# Altium PCB stepstickTester.PcbDoc
Units mm, origin at the board's own origin, x right, y up, seen from the top; angles counter-clockwise.
Board outline 158 x 89 mm, 2 copper layers (Top Layer, Bottom Layer); 77 components, 60 nets, 313 pads, 50 vias.
Unrouted connection lines stored in the file: 83.
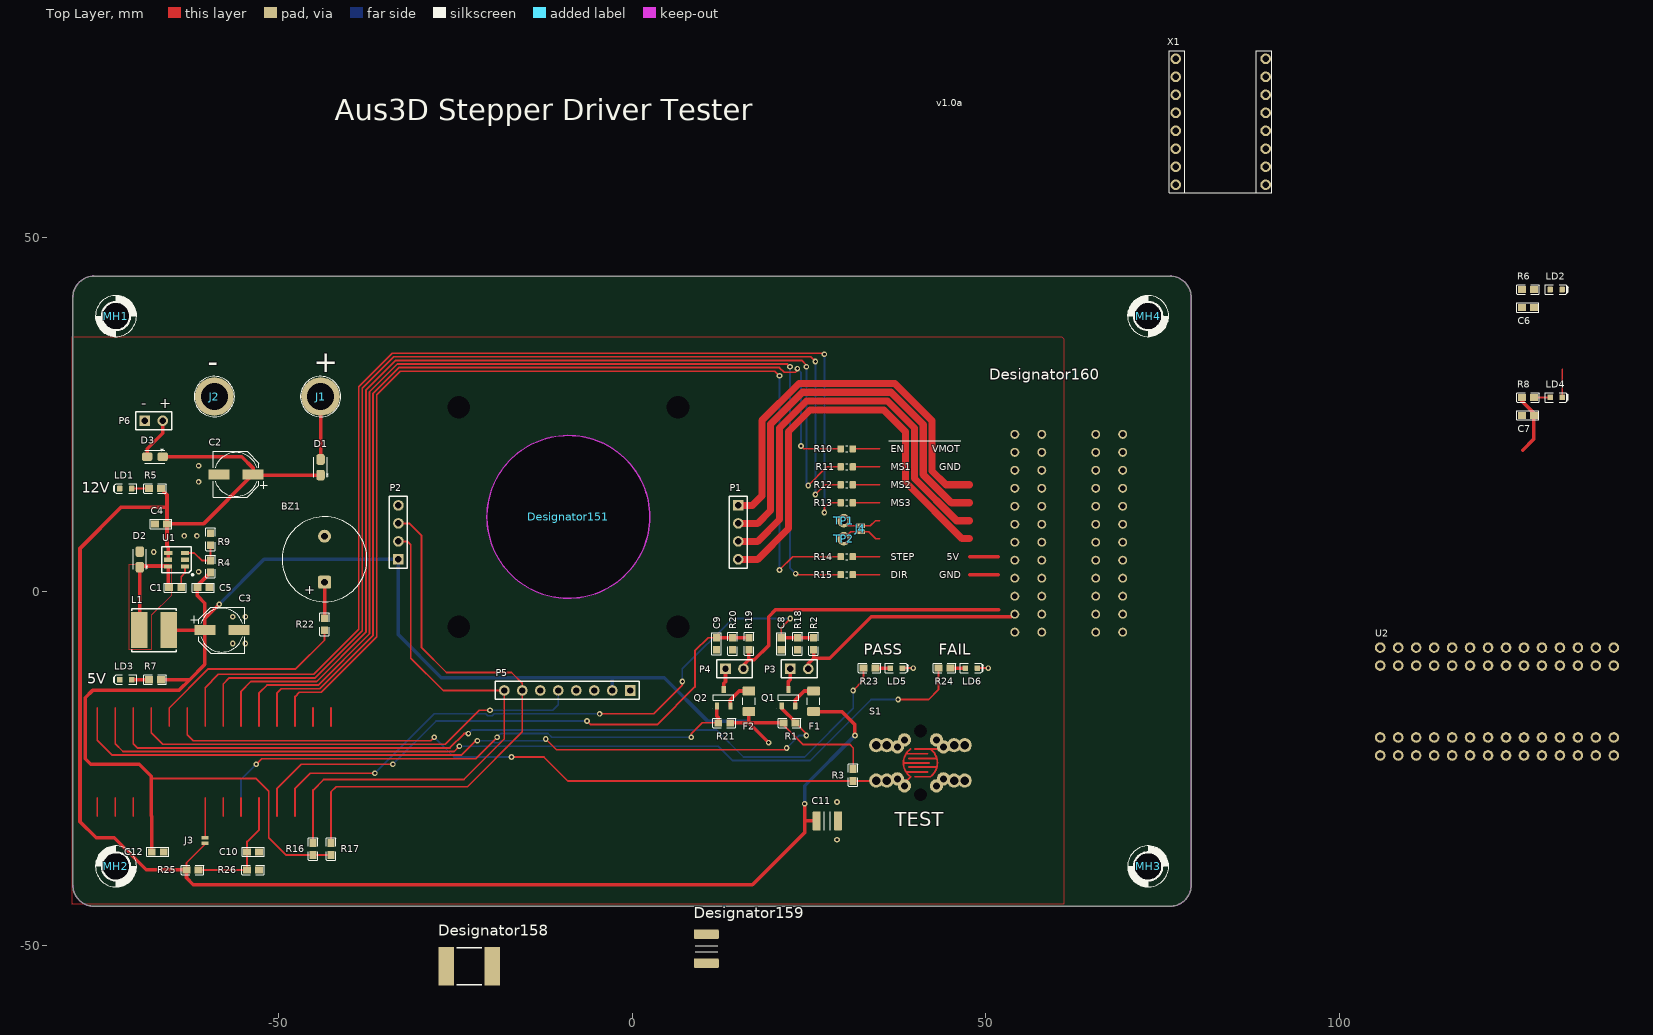
[diagram p0: Top Layer view]
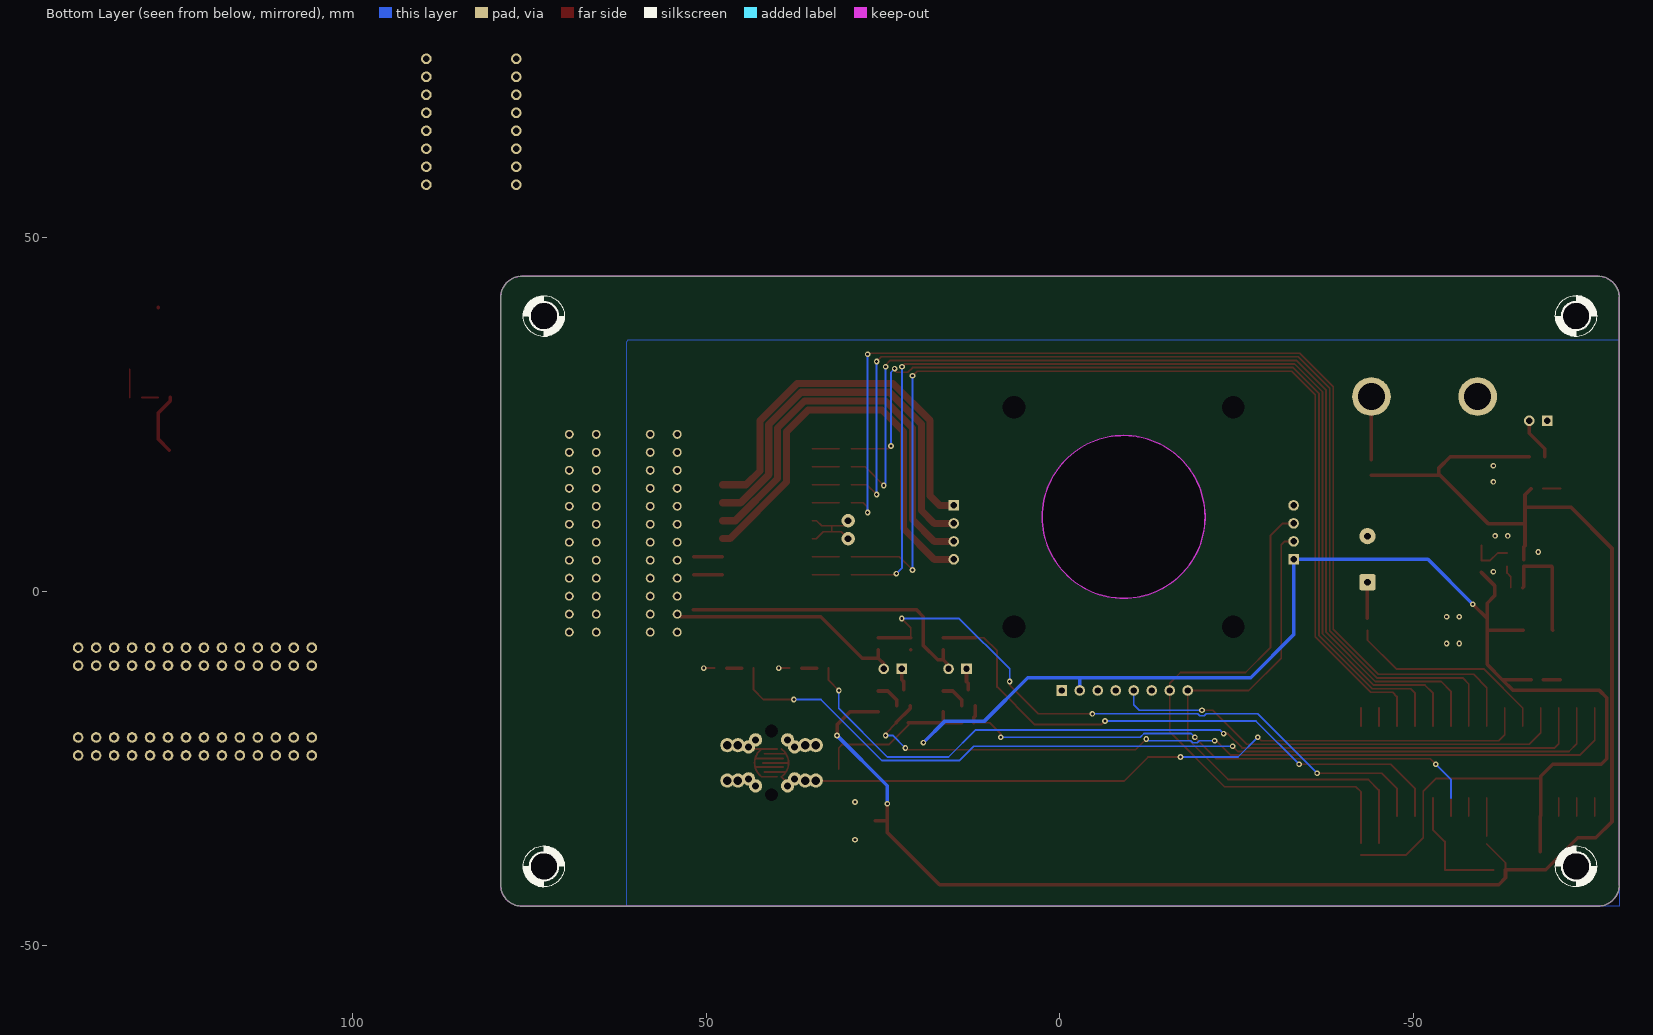
[diagram p1: Bottom Layer view, seen from below]

## Layer stack, top to bottom
Top Solder: solder mask 0.0102, Solder Resist, Dk 3.5
Top Layer: signal copper 0.0356
Dielectric 1: dielectric 0.32, FR-4, Dk 4.8
Bottom Layer: signal copper 0.0356
Bottom Solder: solder mask 0.0102, Solder Resist, Dk 3.5

## Board outline
-76,-44.5 cw(c-76,-41.5) -79,-41.5 -79,41.5 cw(c-76,41.5) -76,44.5 76,44.5 cw(c76,41.5) 79,41.5 79,-41.5 cw(c76,-41.5) 76,-44.5

## Design rules (kind name [scope] priority, off if disabled: settings)
Clearance [All] p1: gap=0.254 ignorepadtopadclearanceinfootprint=FALSE except(0: Arc-Hole Track-Hole SMDPad-Hole THPad-Hole Via-Hole Fill-Hole Poly-Hole Region-Hole Text-Hole)
HoleSize [All] p1: absolutevalues=TRUE maxlimit=3.5 minlimit=0.025 maxpercent=80.000 minpercent=20.000
PolygonConnect PolygonConnect_1 [IsVia] p1: connectstyle=Direct reliefconductorwidth=0.254 reliefentries=4 polygonreliefangle="90 Angle" airgapwidth=0.254
PolygonConnect [All] p2: connectstyle=Relief reliefconductorwidth=0.254 reliefentries=4 polygonreliefangle="90 Angle" airgapwidth=0.254
RoutingVias [All] p1: holewidth=0.4 width=0.8 viastyle="Through Hole" minholewidth=0.35 minwidth=0.7 maxholewidth=0.6 maxwidth=1.2
SolderMaskExpansion [All] p1: expansion=0.102
Width [All] p1: maxlimit=1 minlimit=0.254 preferedwidth=0.254
29 further rules are at their usual default settings.

## Classes and differential pairs
component class stepsticktester: BZ1 C1 C2 C3 C4 C5 C6 C7 C8 C9 C10 C11 C12 D1 D2 D3 F1 F2 J1 J2 J3 J4 L1 LD1 LD2 LD3 LD4 LD5 LD6 MH1 MH2 MH3 MH4 P1 P2 P3 P4 P5 P6 Q1 Q2 R1 R2 R3 R4 R5 R6 R7 R8 R9 R10 R11 R12 R13 R14 R15 R16 R17 R18 R19 R20 R21 R22 R23 R24 R25 R26 S1 TP1 TP2 U1 U2 X1

## Components (designator, comment, footprint, x,y, rotation, side; value= is the part's Value field where it differs from the comment)
BZ1 "Alternate part: 3100-932" BUZZER_12.0X8.5MM -43.44,4.522 r90 top
C1 "CapC-0603-100nF" "Cap 1608-0603" -64.54,0.5 r0 top value=100nF
C2 "CapE-6.3-100uF-35V" "CAP EL PANASONIC" -58.391,16.5 r270 top value="100uF 35V"
C3 "CapE-6.3-100uF-35V" "CAP EL PANASONIC" -55.49,-5.5 r90 top value="100uF 35V"
C4 "CapC-0603-1uF 50V" "Cap 1608-0603" -66.54,9.5 r0 top value=1uF
C5 "CapC-0603-4.7uF" "Cap 1608-0603" -60.54,0.5 r180 top value=4.7uF
C6 "CapC-0603-1uF 50V" "Cap 1608-0603" 126.55,40.08 r0 top value=1uF
C7 "CapC-0603-1uF 50V" "Cap 1608-0603" 126.55,24.84 r0 top value=1uF
C8 "CapC-0603-100nF" "Cap 1608-0603" 21.076,-7.416 r270 top value=100nF
C9 "CapC-0603-100nF" "Cap 1608-0603" 11.932,-7.416 r270 top value=100nF
C10 "CapC-0603-100nF" "Cap 1608-0603" -53.53,-36.82 r0 top value=100nF
C11 "CapC-1210-4.7uF-50V" "CAP 3225-1210" 27.581,-32.435 r180 top value=4.7uF
C12 "CapC-0603-4.7uF" "Cap 1608-0603" -66.992,-36.82 r180 top value=4.7uF
D1 "Diode Schottky 2A 40V" DIOM2616X08N -44,17.51 r90 top
D2 "Diode Schottky 2A 40V" DIOM2616X08N -69.54,4.5 r90 top
D3 "Diode Schottky 2A 40V" DIOM2616X08N -67.4,19 r180 top
Designator151 "Comment" "NEMA-17 CUTOUT" -9,10.5 r180 top
Designator158 "Comment" Chip2PinSM7451X17N -23,-53 r0 top
Designator159 "Comment" CAPC4532X280N 10.5,-50.5 r90 top
Designator160 "Comment" "ZIF Socket - 2 x 12" 61.69,-5.78 r0 top
F1 "PTC Resettable Fuse" "RES 3216-1206" 25.648,-15.544 r90 top value=200mA
F2 "PTC Resettable Fuse" "RES 3216-1206" 16.504,-15.544 r90 top value=200mA
J1 "Through-hole banana jack" BANANA_CONN -44,27.5 r0 top
J2 "Through-hole banana jack" BANANA_CONN -59,27.5 r0 top
J3 "Jumper" JUMPER-2-NO -60.3,-35.2 r270 top
J4 "Jumper" JUMPER-2-NC_BY_PASTE 32.252,8.84 r270 top
L1 "Inductor SMD 33uH 2.5A" "SRN6045TA SMD Inductor" -67.54,-5.5 r90 top value=33uH
LD1 "GREEN" "LED 1608-0603" -71.54,14.5 r180 top
LD2 "GREEN" "LED 1608-0603" 130.55,42.62 r0 top
LD3 "GREEN" "LED 1608-0603" -71.54,-12.5 r180 top
LD4 "GREEN" "LED 1608-0603" 130.55,27.38 r0 top
LD5 "GREEN" "LED 1608-0603" 37.349,-10.859 r0 top
LD6 "RED" "LED 1608-0603" 47.939,-10.859 r0 top
MH1 "Screw Hole" M3-Hole-2 -72.9,38.875 r0 top
MH2 "Screw Hole" M3-Hole-2 -72.9,-38.875 r90 top
MH3 "Screw Hole" M3-Hole-2 72.9,-38.875 r0 top
MH4 "Screw Hole" M3-Hole-2 72.9,38.875 r90 top
P1 "Stepper Motor" HDR1X4-HEADER 15,12.12 r270 top
P2 "Encoder" HDR1X4-HEADER -33,4.5 r90 top
P3 "Current Shunt" HDR1X2-HEADER 22.346,-10.972 r0 top
P4 "Current Shunt" HDR1X2-HEADER 13.202,-10.972 r0 top
P5 "Display" HDR1X8-HEADER -0.26,-14.02 r180 top
P6 "Alt Power In" HDR1X2-HEADER -68.84,24.08 r0 top
Q1 "DMP3099L-7" "SOT23-3 New" 22.092,-15.036 r90 top
Q2 "DMP3099L-7" "SOT23-3 New" 12.948,-15.036 r90 top
R1 "Res-0603-10K" "RES 1608-0603" 22.258,-18.592 r180 top value=10K
R2 "Res-0603-4K7" "RES 1608-0603" 25.648,-7.416 r270 top value=4.7K
R3 "Res-0603-10K" "RES 1608-0603" 31.236,-25.958 r90 top value=10K
R4 "Res-0603-54K9" "RES 1608-0603" -59.54,3.5 r270 top value=54.9k
R5 "Res-0603-1K" "RES 1608-0603" -67.39,14.5 r0 top value=1K
R6 "Res-0603-1K" "RES 1608-0603" 126.55,42.62 r180 top value=1K
R7 "Res-0603-1K" "RES 1608-0603" -67.39,-12.5 r0 top value=1K
R8 "Res-0603-1K" "RES 1608-0603" 126.55,27.38 r180 top value=1K
R9 "Res-0603-10K" "RES 1608-0603" -59.54,7.35 r270 top value=10K
R10 "Thick Film" RESC1608X55N 30.34,20.12 r0 top value=470R
R11 "Thick Film" RESC1608X55N 30.34,17.58 r0 top value=470R
R12 "Thick Film" RESC1608X55N 30.34,15.04 r0 top value=470R
R13 "Thick Film" RESC1608X55N 30.34,12.5 r0 top value=470R
R14 "Thick Film" RESC1608X55N 30.34,4.88 r0 top value=470R
R15 "Thick Film" RESC1608X55N 30.34,2.34 r0 top value=470R
R16 "Res-0603-4K7" "RES 1608-0603" -45.06,-36.4 r270 top value=4.7K
R17 "Res-0603-4K7" "RES 1608-0603" -42.52,-36.4 r270 top value=4.7K
R18 "Res-0603-1K" "RES 1608-0603" 23.362,-7.416 r90 top value=1K
R19 "Res-0603-4K7" "RES 1608-0603" 16.504,-7.416 r270 top value=4.7K
R20 "Res-0603-1K" "RES 1608-0603" 14.218,-7.416 r90 top value=1K
R21 "Res-0603-10K" "RES 1608-0603" 13.036,-18.592 r0 top value=10K
R22 "Res-0603-100R" "RES 1608-0603" -43.44,-4.658 r90 top value=100R
R23 "Res-0603-1K" "RES 1608-0603" 33.539,-10.859 r180 top value=1K
R24 "Res-0603-1K" "RES 1608-0603" 44.129,-10.859 r180 top value=1K
R25 "Res-0603-4K7" "RES 1608-0603" -62.088,-39.36 r180 top value=4.7K
R26 "Res-0603-1K" "RES 1608-0603" -53.53,-39.36 r180 top value=1K
S1 "Tactile Button - Omron B3F-5050" "Tactile Button - B3F-5050" 40.739,-24.249 r0 top
TP1 "TESTPOINT" THP_D38_T75_B75 29.92,9.96 r0 top
TP2 "TESTPOINT" THP_D38_T75_B75 29.92,7.42 r90 top
U1 "AOZ1282CI" SOT23-6N -64.34,4.45 r180 top
U2 "Adafruit Metro Mini" "Adafruit Metro Mini - Double Rows" 105.68,-7.96 r0 top
X1 "A4988BREAKOUT" A4988BREAKOUT 76.8,75.2 r270 top

## Footprints (in the part's own frame and the unit in brackets; to place one, negate y for a bottom-side part, rotate by r counter-clockwise, add the part's x,y. Pads: shape width x height; smd on the part's side, far side on the other; paste and mask are expansions set on the pad)
A4988BREAKOUT [mm]
  round 1.51 hole 0.9: 1(0,0) 2(2.54,0) 3(5.08,0) 4(7.62,0) 5(10.16,0) 6(12.7,0) 7(15.24,0) 8(17.78,0) 9(17.78,12.7) 10(15.24,12.7) 11(12.7,12.7) 12(10.16,12.7) 13(7.62,12.7) 14(5.08,12.7) 15(2.54,12.7) 16(0,12.7)
  silkscreen extent -1.14,-0.89 18.92,13.59, body extent -1.27,-1.33 19.05,13.91, height 8.5
"Adafruit Metro Mini - Double Rows" [mm]
  round 1.5 hole 0.9: 0(33.02,-2.54) 0(33.02,0) 1(30.48,-2.54) 1(30.48,0) 2(27.94,-2.54) 2(27.94,0) 3(25.4,-2.54) 3(25.4,0) 4(22.86,-2.54) 4(22.86,0) 5(20.32,-2.54) 5(20.32,0) 6(17.78,-2.54) 6(17.78,0) 7(15.24,-2.54) 7(15.24,0) 8(12.7,-2.54) 8(12.7,0) 9(10.16,-2.54) 9(10.16,0) 10(7.62,-2.54) 10(7.62,0) 11(5.08,-2.54) 11(5.08,0) 12(2.54,-2.54) 12(2.54,0) 13(0,-2.54) 13(0,0) 14(0,-15.24) 14(0,-12.7) 15(2.54,-15.24) 15(2.54,-12.7) 16(5.08,-15.24) 16(5.08,-12.7) 17(7.62,-15.24) 17(7.62,-12.7) 18(10.16,-15.24) 18(10.16,-12.7) 19(12.7,-15.24) 19(12.7,-12.7) 20(15.24,-15.24) 20(15.24,-12.7) 21(17.78,-15.24) 21(17.78,-12.7) 22(20.32,-15.24) 22(20.32,-12.7) 23(22.86,-15.24) 23(22.86,-12.7) 24(25.4,-15.24) 24(25.4,-12.7) 25(27.94,-15.24) 25(27.94,-12.7) 26(30.48,-15.24) 26(30.48,-12.7) 27(33.02,-15.24) 27(33.02,-12.7)
BANANA_CONN [mil]
  round 215 hole 150: P$1(0,0)
  silkscreen extent -112,-112 112,112
BUZZER_12.0X8.5MM [mil]
  round 20 on Mech15: 0(0,0)
  rrect25% 72x72 / inner rrect25% 72x72 / far side rrect25% 90x90 hole 38: 1(-127.95,0)
  round 72 / inner round 72 / far side round 90 hole 38: 2(127.95,0)
  silkscreen extent -236,-236 236,236, body extent -246,-246 246,246, height 354
"Cap 1608-0603" [mm]
  rect 1.1x1 smd: 1(-0.85,0) 2(0.85,0)
  silkscreen extent -1.55,-0.65 1.55,0.65, body extent -0.8,-0.4 0.8,0.4, height 0.4
"CAP 3225-1210" [mm] "Chip Capacitor, Body 3.2x2.5mm, EIA 1210, IPC Medium Density"
  round 0.508 on Mech15: 0(0,0)
  rrect25% 1.15x2.7 smd: 1(-1.5,0) 2(1.5,0)
  silkscreen extent -0.4,-1.3 0.4,1.3, body extent -1.8,-1.4 1.8,1.4, height 2.19
"CAP EL PANASONIC" [mil]
  rect 55x118 smd: 1(0,190.97) 2(0,1.97)
  silkscreen extent -128,-31 127,271, body extent -134,-57 134,250, height 217
CAPC4532X280N [mm] "Chip Capacitor, Body 4.5x3.2mm, 1812, IPC Medium Density"
  round 0.508 on Mech15: 0(0,0)
  rrect25% 1.4x3.5 smd: 1(-2.05,0) 2(2.05,0)
  silkscreen extent -0.4,-1.6 0.4,1.6, body extent -2.45,-1.8 2.45,1.8, height 2.79
Chip2PinSM7451X17N [mm] ", 2-Leads, Body 7.36x5.12mm, IPC Medium Density"
  rect 2.2x5.45 smd: 1(-3.25,0) 2(3.25,0)
  silkscreen extent -1.75,-2.62 1.75,2.63, body extent 0,0 0,0
DIOM2616X08N [mm] "Molded Diode, 2-Leads, Body 2.60x1.60mm, IPC Medium Density"
  rrect50% 1.5x1.2 smd: A(1.1,0) K(-1.1,0)
  silkscreen extent -1.4,-1.11 1.4,0.95, body extent -1.35,-0.85 1.35,0.85, height 0.85
HDR1X2-HEADER [mm]
  rect 1.5x1.5 hole 0.9: 1(0,0)
  round 1.5 hole 0.9: 2(2.54,0)
  silkscreen extent -1.27,-1.27 3.81,1.27, body extent -1.27,-1.27 3.81,1.27, height 8.6
HDR1X4-HEADER [mm]
  rect 1.5x1.5 hole 0.9: 1(0,0)
  round 1.5 hole 0.9: 2(2.54,0) 3(5.08,0) 4(7.62,0)
  silkscreen extent -1.27,-1.27 8.89,1.27, body extent -1.27,-1.27 8.89,1.27, height 8.6
HDR1X8-HEADER [mm]
  rect 1.5x1.5 hole 0.9: 1(0,0)
  round 1.5 hole 0.9: 2(2.54,0) 3(5.08,0) 4(7.62,0) 5(10.16,0) 6(12.7,0) 7(15.24,0) 8(17.78,0)
  silkscreen extent -1.27,-1.27 19.05,1.27, body extent -1.27,-1.27 19.05,1.27, height 8.6
JUMPER-2-NC_BY_PASTE [mil]
  rect 25x50 smd: 1(-15.78,0) 2(17,0)
JUMPER-2-NO [mm]
  rect 0.5x1 smd: 1(-0.4,0) 2(0.4,0)
"LED 1608-0603" [mm]
  round 0.254 on Mech15: 0(0,0)
  rrect25% 0.8x0.8 smd: 1(-0.85,0) 2(0.85,0)
  Top Layer pour cut-out: -0.5,0.5 0.5,0.5 0.5,-0.5 -0.5,-0.5
  silkscreen extent -1.55,-0.67 1.68,0.67, body extent -0.8,-0.4 0.8,0.4, height 0.75
M3-Hole-2 [mm]
  round 3.6 hole 4.2: M3(0,0)
  silkscreen extent -2.9,-2.93 2.9,2.93
"NEMA-17 CUTOUT" [mm]
  round 0 hole 3.2: ""(-15.5,15.5) ""(-15.5,-15.5) ""(15.5,15.5) ""(15.5,-15.5)
  Keep-Out Layer circle w0.1: c0,0 r11.5
  Keep-Out Layer board cut-out: 0,-11.5 -4.401,-10.625 -8.132,-8.132 -10.625,-4.401 -11.5,0 -11.5,0 -10.625,4.401 -8.132,8.132 -4.401,10.625 0,11.5 0,11.5 4.401,10.625 8.132,8.132 10.625,4.401 11.5,0 11.5,0 10.625,-4.401 8.132,-8.132 4.401,-10.625 0,-11.5
"RES 1608-0603" [mm]
  rect 1.1x1 smd: 1(-0.85,0) 2(0.85,0)
  silkscreen extent -1.6,-0.67 1.6,0.67, body extent -0.77,-0.38 0.82,0.43, height 0.4
"RES 3216-1206" [mm] "Chip Resistor, Body 3.2x1.6mm, EIA 1206, IPC Medium Density"
  round 0.508 on Mech15: 0(0,0)
  rrect25% 1.3x1.8 smd: 1(-1.45,0) 2(1.45,0)
  silkscreen extent -0.51,-0.89 0.51,0.89, body extent -1.62,-0.82 1.63,0.83, height 0.69
RESC1608X55N [mm] "Chip Resistor, Body 1.6x0.8mm, EIA 0603, IPC Medium Density"
  round 0.254 on Mech15: 0(0,0)
  rrect25% 0.9x1 smd: 1(-0.85,0) 2(0.85,0)
  Top Layer pour cut-out: -0.6,0.5 -0.4,0.7 0.4,0.7 0.6,0.5 0.6,-0.5 0.4,-0.7 -0.4,-0.7 -0.6,-0.5
  silkscreen extent -0.15,-0.41 0.15,0.41, body extent -0.87,-0.47 0.88,0.48, height 0.54
"SOT23-3 New" [mm] "SOT23, 3 pin"
  round 0.5 on Mech15: 0(0,0)
  rrect25% 1x0.6 smd: 1(-1.15,0.95) 2(-1.15,-0.95) 3(1.15,0)
  silkscreen extent -0.38,-1.45 0.38,1.45, body extent -1.4,-1.45 1.4,1.45, height 1.29
SOT23-6N [mm]
  rect 1.15x0.6 smd: 1(-1.175,0.95) 2(-1.175,0) 3(-1.175,-0.95) 4(1.175,-0.95) 5(1.2,0) 6(1.2,0.95)
  silkscreen extent -2.38,-1.82 2.1,2.25, body extent -0.85,-1.5 0.85,1.5, height 1.45
"SRN6045TA SMD Inductor" [mm]
  rect 5.1x2.35 smd: 1(0,2.075) 2(0,-2.075)
  silkscreen extent -3.05,-3.15 3.05,3.15, body extent -3,-3 3,3, height 4.25
"Tactile Button - B3F-5050" [mm]
  round 2 hole 1.2: 0(-6.25,2.5) 0(-4.75,2.5) 0(4.75,-2.5) 0(6.25,-2.5) 1(4.75,2.5) 1(6.25,2.5) 2(-6.25,-2.5) 2(-4.75,-2.5)
  round 1.88 hole 1.016: 0(-3.251,2.261) 0(-2.261,3.251) 0(2.261,-3.251) 0(3.251,-2.261) 1(2.261,3.251) 1(3.251,2.261) 2(-3.251,-2.261) 2(-2.261,-3.251)
  round 1.6 hole 1.8: 5(0,4.5) 6(0,-4.5)
  Top Layer lines w0.254: -6.25,-2.5 -4.75,-2.5 -3.251,-2.5 -2.261,-2.5 -1.91,-2.5 -1.376,-1.966 cw(c0,0) -2.4,0 ; -2,-1.3 1,-1.3 ; -2,1.3 1,1.3 ; -1.6,-0.6 2.2,-0.6 ; -1.6,0.6 2.2,0.6 ; -1.376,1.966 ccw(c0,0) -2.4,0 ; -0.766,-1.966 1.376,-1.966 ccw(c0,0) 1.376,1.966 ; -0.766,1.966 1.376,1.966 ; 1.25,0 -2.4,0 ; 5.716,1.966 4.75,1.966 3.251,1.966 1.376,1.966
  body extent -6,-6 6,6, height 7.3
THP_D38_T75_B75 [mil] "Thru-Hole Pad with 75mil top and 75mil bottom annular rings"
  round 75 hole 38: 1(0,0)
"ZIF Socket - 2 x 12" [mil]
  round 50 hole 32: 1(-300,0) 1(-150,0) 2(-300,100) 2(-150,100) 3(-300,200) 3(-150,200) 4(-300,300) 4(-150,300) 5(-300,400) 5(-150,400) 6(-300,500) 6(-150,500) 7(-300,600) 7(-150,600) 8(-300,700) 8(-150,700) 9(-300,800) 9(-150,800) 10(-300,900) 10(-150,900) 11(-300,1000) 11(-150,1000) 12(-300,1100) 12(-150,1100) 13(150,0) 13(300,0) 14(150,100) 14(300,100) 15(150,200) 15(300,200) 16(150,300) 16(300,300) 17(150,400) 17(300,400) 18(150,500) 18(300,500) 19(150,600) 19(300,600) 20(150,700) 20(300,700) 21(150,800) 21(300,800) 22(150,900) 22(300,900) 23(150,1000) 23(300,1000) 24(150,1100) 24(300,1100)

## Part data
BZ1: library part BZ_12x8.5x6.5_2kHz, "Speaker, Magnetic Transducer", Manufacturer 1="CUI Inc", Manufacturer Part Number 1=CEM-1201(50), Package / Case="6.5mm pitch", Ratings="2048 ±200 Hz", Supplier Part Number 1=102-1152-ND, Material="Noryl SE1-J", SCDType=source, Supplier 1=Digi-Key
C1 C8 C9 C10: "Capacitor (Semiconductor SIM Model)", Supplier Part Number 1=311-1344-1-ND, Note="Approved sub OK", Published=8-Jun-2000, Publisher="Altium Limited", Revision="July-2002: Re-released for DXP Platform.", Supplier 1=Digi-Key
C2 C3: "Polarized Capacitor (Surface Mount)", Supplier Part Number 1=PCE5016CT-ND, Note="Approved sub OK", Published=8-Jun-2000, Publisher="Altium Limited", Revision="July-2002: Re-released for DXP Platform.", Supplier 1=Digi-Key
C4 C6 C7: "Capacitor (Semiconductor SIM Model)", Supplier Part Number 1=1276-1860-1-ND, Voltage=50V, Note="Approved sub OK", Published=8-Jun-2000, Publisher="Altium Limited", Revision="July-2002: Re-released for DXP Platform.", Supplier 1=Digi-Key
C5 C12: "Capacitor (Semiconductor SIM Model)", Supplier Part Number 1=311-1521-1-ND, Note="Approved sub OK", Published=8-Jun-2000, Publisher="Altium Limited", Revision="July-2002: Re-released for DXP Platform.", Supplier 1=Digi-Key
C11: "Capacitor (Semiconductor SIM Model)", Supplier Part Number 1=490-1864-1-ND, Voltage=50V, Note="Approved sub OK", Published=8-Jun-2000, Publisher="Altium Limited", Revision="July-2002: Re-released for DXP Platform.", Supplier 1=Digi-Key
D1 D2 D3: "Default Diode", Supplier Part Number 1=DB2W40200LCT-ND, Code - JEDEC=DO-214-AB, Note="Approved sub OK", Published=8-Jun-2000, Publisher="Altium Limited", Revision="July-2002: Re-released for DXP Platform.", Supplier 1=Digi-Key
F1 F2: library part "Fuse - 30V 200mA Trip PTC SMD 1206", "Fuse - 30V 200mA Trip PTC SMD 1206", Package / Case="1206 (3216 metric)", Supplier Part Number 1=507-1797-1-ND, Supplier 1=Digi-Key
J1 J2: library part BANANA_CONN
J3: library part JUMP1-NO, "SMD jumper"
J4: library part JUMP1-NC, "SMD jumper"
L1: "MagneticCore Inductor with Winding Polarity Marking", Supplier Part Number 1=SRN6045TA-330MCT-ND, Note="Approved sub OK", Published=24-Mar-1999, Publisher="Altium Limited", Revision="July-2002: Re-released for DXP Platform.", Supplier 1=Digi-Key
LD1 LD2 LD3 LD4 LD5: library part "LEDG  0603", "Hyper-Bright LED", Supplier Part Number 1=160-1435-2-ND, Note="Approved sub OK", Supplier 1=Digi-Key
LD6: library part "LEDR  0603", "Hyper-Bright LED", Supplier Part Number 1=160-1435-2-ND, Note="Approved sub OK", Supplier 1=Digi-Key
P1 P2: library part "Header 4", "Header, 4-Pin", Supplier Part Number 1=3M9449-ND, LatestRevisionDate=17-Jul-2002, LatestRevisionNote="Re-released for DXP Platform.", Note="Approved sub OK", Publisher="Altium Limited", Supplier 1=Digi-Key
P3 P4 P6: library part "Header 2", "Header, 2-Pin", Supplier Part Number 1=3M9447-ND, LatestRevisionDate=17-Jul-2002, LatestRevisionNote="Re-released for DXP Platform.", Note="Approved sub OK", Publisher="Altium Limited", Supplier 1=Digi-Key
P5: library part "Header 8x1", "Header, 8-Pin", Supplier Part Number 1=3M9449-ND, LatestRevisionDate=17-Jul-2002, LatestRevisionNote="Re-released for DXP Platform.", Note="Approved sub OK", Publisher="Altium Limited", Supplier 1=Digi-Key
Q1 Q2: library part "MOSFET SMD P-CH 20V 3.8A TSOT-23-6", "MOSFET SMD P-CH 20V 3.8A SOT-23-3", Supplier Part Number 1=DMP3099L-7DICT-ND, FET Type="MOSFET P-Channel, Metal Oxide", Supplier 1=Digi-Key
R1 R3 R9 R21: "Resistor", Supplier Part Number 1=311-10.0KHRCT-ND, Note="Approved sub OK", Published=8-Jun-2000, Publisher="Altium Limited", Revision="July-2002: Re-released for DXP Platform.", Supplier 1=Digi-Key
R2 R16 R17 R19 R25: "Resistor", Supplier Part Number 1=311-4.7KGRCT-ND, Note="Approved sub OK", Published=8-Jun-2000, Publisher="Altium Limited", Revision="July-2002: Re-released for DXP Platform.", Supplier 1=Digi-Key
R4: library part Res-0603-10K, "Resistor", Supplier Part Number 1=311-10.0KHRCT-ND, Note="Approved sub OK", Published=8-Jun-2000, Publisher="Altium Limited", Revision="July-2002: Re-released for DXP Platform.", Supplier 1=Digi-Key
R5 R6 R7 R8 R18 R20 R23 R24 R26: "Resistor", Supplier Part Number 1=311-1.00KHRCT-ND, Note="Approved sub OK", Published=8-Jun-2000, Publisher="Altium Limited", Revision="July-2002: Re-released for DXP Platform.", Supplier 1=Digi-Key
R10 R11 R12 R13 R14 R15: library part RES_470R_0603_5%, "Resistor SMD chip 470 Ohm 0.1W 5% 0603", Manufacturer 1=Vishay/Dale, Manufacturer Part Number 1=CRCW0603470RJNEA, Package / Case="0603 (1608 metric)", Ratings="1/10 W", Supplier Part Number 1=541-470GCT-ND, TOLERANCE=±5%, Material="Thick Film", SCDType=spec, Supplier 1=Digi-Key
R22: "Resistor", Supplier Part Number 1=311-100HRCT-ND, Note="Approved sub OK", Published=8-Jun-2000, Publisher="Altium Limited", Revision="July-2002: Re-released for DXP Platform.", Supplier 1=Digi-Key
S1: Manufacturer 1=E-Switch, Manufacturer Part Number 1=TL-1105-C-F160-Q, Package / Case="6.0x6.0mm; 8.0mm stem", Supplier Part Number 1=SW801-ND, Function=On/Off, Material="Brass/Nylon/Ag plating", SCDType=source*, Supplier 1=Digi-Key
TP1 TP2: "SMD test pin"
U1: library part "Buck Regulator AOZ1282CI", Supplier Part Number 1=785-1613-1-ND, Supplier 1=Digi-Key
X1: Supplier Part Number 1=S7006-ND, Supplier 1=Digi-Key

## Via types
v1: diameter 0.8, hole 0.4, Top Layer to Bottom Layer, tented both sides, 50 vias

## Nets (pads, with @x,y where several pads share a name; then routed paths per layer and width w, separated by ;. In a path a pad name is that pad's centre, name@x,y a point inside that pad or via, vN(x,y) a via of type N, cw(c..) or ccw(c..) an arc to the next point about the centre after c; other vN are vias at no path point)
+3V: U2.16 | length 2.5
  Top Layer w0.254: -70.46,-31.74 -70.46,-29.2
+5V: C3.1 C5.2 C12.2 F2.1 L1.2 P2.1 P5.2 R1.2 R3.2 R4.2 R7.2 R16.2 R17.2 R21.2 U2.17 | length 235
  Top Layer w0.254: -67.92,-26.466 -53.092,-26.466 -51.314,-28.244 -51.314,-34.848 -48.912,-37.25 R16.2 R17.2 ; R1.2 21.408,-18.924 24.124,-21.64 30.728,-21.64 31.236,-22.148 R3.2
  Top Layer w0.5: C12.2 -67.842,-31.818 -67.92,-31.74 -67.92,-26.466 -67.92,-26.116 -69.602,-24.434 -76.46,-24.434 -77.222,-23.672 -77.222,-15.036 -76.206,-14.02 -64.014,-14.02 -62.494,-12.5 ; R7.2 -62.494,-12.5 ; L1.2 C3.1 ; R4.2 -61.39,0.8 C5.2 -61.39,-0.642 -60.341,-1.691 -60.341,-3.86 ; v1(-58.309,-1.828) -60.341,-3.86 ; R21.2 16.504,-18.592 ; F2.1 16.504,-18.592 ; v1(19.298,-21.386) 16.504,-18.592 ; R1.2 16.504,-18.592 ; -62.494,-12.5 -60.341,-10.347 C3.1 ; C3.1 -60.341,-3.86
  Bottom Layer w0.5: v1(-58.309,-1.828) -51.981,4.5 P2.1 -33,-6.172 -26.93,-12.242 -2.8,-12.242 ; P5.2 -2.8,-12.242 ; v1(19.298,-21.386) 16.25,-18.338 10.662,-18.338 4.566,-12.242 -2.8,-12.242
+12V: C2.1 C4.2 C11.2 D1.K D3.K F1.1 J3.2 R5.2 R25.2 U1.4 U1.5 | length 243.8
  Top Layer w0.254: R25.2 -62.938,-38.344 J3.2@-60.3,-35.706
  Top Layer w0.5: R5.2 -65.69,13.65 -65.69,11.888 ; D3.K -55.124,19 -53.54,17.416 C2.1 ; U1.5 -65.54,6.298 -65.538,6.3 -65.69,6.452 C4.2 ; D1.K -53.45,16.41 C2.1 ; v1(24.378,-30.022) 24.378,-32.308 ; F1.1 29.638,-16.994 31.49,-18.846 v1(31.49,-20.37) ; C11.2 24.505,-32.435 24.378,-32.308 ; C4.2 -60.54,9.5 C2.1 ; C4.2 -65.69,11.888 ; -65.69,11.888 -72.142,11.888 -77.984,6.046 -77.984,-32.562 -75.698,-34.848 -73.158,-34.848 -68.646,-39.36 R25.2 -62.938,-40.496 -61.982,-41.452 17.012,-41.452 24.378,-34.086 24.378,-32.308
  Bottom Layer w0.5: v1(24.378,-30.022) 24.378,-27.482 v1(31.49,-20.37)
+STEPPER_5V: C7.2 P4.2 R8.2 R19.2 X1.10 | length 56.5
  Top Layer w0.5: P4.2 15.742,-10.464 16.504,-9.702 ; R19.2 16.504,-9.702 ; 47.7,4.88 51.7,4.88 ; 51.81,-2.59 20.314,-2.59 19.298,-3.606 19.298,-7.67 17.266,-9.702 16.504,-9.702 ; R8.2 125.7,26.878 127.4,25.178 C7.2 127.4,21.5 125.81,19.91
+STEPPER_12V: C6.2 P3.2 R2.2 R6.2 X1.16 | length 33.4
  Top Layer w0.5: P3.2 24.886,-10.21 25.648,-9.448 ; R2.2 25.648,-9.448 ; 53.588,-3.606 33.776,-3.606 27.934,-9.448 25.648,-9.448 ; C6.2 C6.2@127.4,40.143
+USB: U2.14 | length 2.5
  Top Layer w0.254: -75.54,-31.74 -75.54,-29.2
AREF: U2.21 | length 2.5
  Top Layer w0.254: -57.76,-31.74 -57.76,-29.2
BTN_TEST: R3.1 S1.2 U2.8 | length 105.7
  Top Layer w0.254: -62.84,-16.5 -62.84,-20.274 -62.001,-21.113 -28.435,-21.113 v1(-27.946,-20.624) ; v1(-17.024,-23.418) -12.452,-23.418 -9.062,-26.808 R3.1 35.93,-26.808 S1.2@35.989,-26.749
  Bottom Layer w0.254: v1(-27.946,-20.624) -25.152,-23.418 v1(-17.024,-23.418)
BUZZER: R22.1 U2.9 | length 29.9
  Top Layer w0.254: -65.38,-19.04 -65.38,-16.5 -59.852,-10.972 -47.504,-10.972 -43.44,-6.908 R22.1
FB1: R4.1 R9.2 U1.3 | length 6.2
  Top Layer w0.254: U1.3 -61.844,5.4 -60.794,4.35 R4.1 R9.2
GND: BZ1.2 C2.2 C3.2 C4.1 C5.1 C6.1 C7.1 C8.2 C9.2 C10.2 C11.1 C12.1 D2.A J2.P$1 LD1.2 LD2.2 LD3.2 LD4.2 LD5.2 LD6.2 P2.4 P5.1 P6.1 R9.1 R18.1 R20.1 R26.1 S1.1 U1.2 U2.18 U2.19 X1.9 X1.15 | length 11
  Top Layer w0.254: LD5.2 v1(39.731,-10.859) ; LD6.2 v1(50.321,-10.859) ; 131.398,31.34 131.4,31.338 LD4.2
  Top Layer w0.5: 47.7,2.34 51.7,2.34
  other v1: 28.95,-35.102 28.95,-29.768 -56.394,-7.394 -54.616,-7.394 -56.394,-3.606 -54.616,-3.606 -61.22,2.744 -67.57,5.538 -63.252,7.824 -61.474,7.824 -61.22,15.444 -61.22,17.73
GREEN_LED: R23.2 U2.11 | length 118.8
  Top Layer w0.254: -70.46,-16.5 -70.46,-21.544 -69.875,-22.129 -25.729,-22.129 -23.717,-20.116 v1(-23.12,-20.116) ; v1(31.236,-14.02) 32.689,-12.567 R23.2
  Bottom Layer w0.254: v1(-23.12,-20.116) -22.593,-19.589 11.913,-19.589 15.742,-23.418 24.378,-23.418 31.236,-16.56 v1(31.236,-14.02)
I2C_SCL: P2.3 P5.7 R17.1 U2.27 | length 80.7
  Top Layer w0.254: R17.1 -42.52,-28.34 -41.789,-27.609 -23.247,-27.609 -15.5,-19.862 P5.7 -15.5,-13.004 -17.024,-11.48 -26.212,-11.48 -29.724,-7.968 -29.724,7.824 -31.48,9.58 P2.3
I2C_SDA: P2.2 P5.8 R16.1 U2.26 | length 77.4
  Top Layer w0.254: R16.1 -45.06,-28.086 -43.567,-26.593 -23.755,-26.593 -18.04,-20.878 P5.8 -26.676,-14.02 -31.248,-9.448 -31.248,6.554 -31.734,7.04 P2.2
LCD_CS: P5.4
LCD_DC: P5.6
LCD_RST: P5.5 U2.10 | length 66
  Top Layer w0.254: -67.92,-16.5 -67.92,-20.02 -66.319,-21.621 -26.403,-21.621 -21.596,-16.814 v1(-20.072,-16.814)
  Bottom Layer w0.254: v1(-20.072,-16.814) -11.182,-16.814 -10.42,-16.052 P5.5
NetBZ1_1: BZ1.1 R22.2 | length 5.1
  Top Layer w0.5: R22.2 BZ1.1
NetC1_1: C1.1 D2.K L1.1 U1.6 | length 16
  Top Layer w0.5: L1.1 -69.54,-5.425 D2.K -69.44,3.5 U1.6 -65.54,0.65 C1.1
NetC1_2: C1.2 U1.1 | length 3.2
  Top Layer w0.254: C1.2 -63.69,2.052 -63.165,2.577 U1.1
NetD1_A: D1.A J1.P$1 | length 8.9
  Top Layer w0.5: D1.A J1.P$1
NetD3_A: D3.A P6.2 | length 6
  Top Layer w0.5: D3.A -68.5,20.102 -66.3,22.302 P6.2
NetF1_2: F1.2 Q1.2 | length 4
  Top Layer w0.5: Q1.2 23.042,-15.356 24.304,-14.094 F1.2
NetF2_2: F2.2 Q2.2 | length 4
  Top Layer w0.5: Q2.2 13.898,-15.356 15.16,-14.094 F2.2
NetJ3_1: J3.1 U2.20 | length 5.4
  Top Layer w0.254: J3.1@-60.3,-34.594 -60.3,-29.2
NetJ4_1: J4.1 TP1.1 X1.5 | length 5.7
  Top Layer w0.254: TP1.1 30.639,9.241 J4.1 33.669,9.241 34.388,9.96 35,9.96
NetJ4_2: J4.2 TP2.1 X1.6 | length 5.9
  Top Layer w0.254: TP2.1 30.908,8.408 J4.2 33.446,8.408 34.434,7.42 35,7.42
NetLD1_1: LD1.1 R5.1 | length 2.5
  Top Layer w0.254: LD1.1 R5.1
NetLD2_1: LD2.1 R6.1
NetLD3_1: LD3.1 R7.1 | length 2.5
  Top Layer w0.5: LD3.1 R7.1
NetLD4_1: LD4.1 R8.1 | length 2.3
  Top Layer w0.254: R8.1 LD4.1
NetLD5_1: LD5.1 R23.1 | length 2.1
  Top Layer w0.5: R23.1 LD5.1
NetLD6_1: LD6.1 R24.1 | length 2.1
  Top Layer w0.5: R24.1 LD6.1
NetP1_1: P1.1 X1.14 | length 56.2
  Top Layer w1: P1.1 16.99,12.12 18.33,13.46 18.33,24.114 23.582,29.366 37.112,29.366 42.396,24.082 42.396,16.979 44.335,15.04 47.7,15.04
NetP1_2: P1.2 X1.13 | length 58.1
  Top Layer w1: P1.2 17.752,9.58 19.584,11.412 19.584,23.595 24.101,28.112 36.593,28.112 41.142,23.563 41.142,16.46 45.102,12.5 47.7,12.5
NetP1_3: P1.3 X1.12 | length 59.7
  Top Layer w1: P1.3 17.752,7.04 20.838,10.126 20.838,23.075 24.621,26.858 36.073,26.858 39.888,23.043 39.888,15.941 45.869,9.96 47.7,9.96
NetP1_4: P1.4 X1.11 | length 61.2
  Top Layer w1: P1.4 17.752,4.5 22.092,8.84 22.092,22.556 25.14,25.604 35.554,25.604 38.634,22.524 38.634,15.421 46.635,7.42 47.7,7.42
NetP3_1: P3.1 Q1.3 | length 3
  Top Layer w0.5: Q1.3 22.092,-12.75 22.346,-12.496 P3.1
NetP4_1: P4.1 Q2.3 | length 3
  Top Layer w0.5: Q2.3 12.948,-13.004 13.202,-12.75 P4.1
NetR10_2: R10.2 X1.1 | length 3.8
  Top Layer w0.254: R10.2 35,20.12
NetR11_2: R11.2 X1.2 | length 3.8
  Top Layer w0.254: R11.2 35,17.58
NetR12_2: R12.2 X1.3 | length 3.8
  Top Layer w0.254: R12.2 35,15.04
NetR13_2: R13.2 X1.4 | length 3.8
  Top Layer w0.254: R13.2 35,12.5
NetR14_2: R14.2 X1.7 | length 3.8
  Top Layer w0.254: R14.2 35,4.88
NetR15_2: R15.2 X1.8 | length 3.8
  Top Layer w0.254: R15.2 35,2.34
RAW_12V_TEST: C10.1 R25.1 R26.2 U2.23 | length 17.7
  Top Layer w0.254: R25.1 R26.2 C10.1 -54.38,-35.374 -52.68,-33.674 -52.68,-29.2
RED_LED: R24.2 U2.12 | length 130.2
  Top Layer w0.254: -73,-16.5 -73,-21.544 -71.907,-22.637 -25.133,-22.637 v1(-24.39,-21.894) ; v1(37.586,-15.29) 41.904,-15.29 43.279,-13.915 R24.2
  Bottom Layer w0.254: v1(-24.39,-21.894) -24.371,-21.913 -21.526,-21.913 -21.507,-21.894 -19.609,-21.894 -19.59,-21.913 -18.522,-21.913 -18.503,-21.894 12.186,-21.894 14.218,-23.926 25.14,-23.926 33.776,-15.29 v1(37.586,-15.29)
RESET: U2.15 | length 2.5
  Top Layer w0.254: -73,-31.74 -73,-29.2
RXD: U2.0 | length 2.5
  Top Layer w0.254: -42.52,-19.04 -42.52,-16.5
STEPPER_5V_EN: Q2.1 R21.1 U2.22 | length 79.1
  Top Layer w0.254: -55.22,-31.74 -55.22,-29.2 ; v1(-53.092,-24.434) -52.311,-23.653 -22.085,-23.653 v1(-19.056,-20.624) ; v1(8.376,-20.624) 8.376,-20.116 9.9,-18.592 R21.1
  Top Layer w0.5: Q2.1 11.998,-17.642 12.186,-17.83 R21.1
  Bottom Layer w0.254: -55.22,-29.2 -55.22,-26.562 v1(-53.092,-24.434) ; v1(-19.056,-20.624) -18.529,-20.097 -11.874,-20.097 -11.347,-20.624 v1(8.376,-20.624)
STEPPER_5V_TEST: C9.1 R19.1 R20.2 U2.24 | length 82.8
  Top Layer w0.254: -50.14,-31.74 -50.14,-27.832 -46.742,-24.434 v1(-33.788,-24.434) ; v1(-6.356,-18.338) -5.848,-18.846 3.55,-18.846 8.884,-13.512 8.884,-8.432 10.75,-6.566 C9.1
  Top Layer w0.5: C9.1 R20.2 R19.1
  Bottom Layer w0.254: v1(-33.788,-24.434) -27.692,-18.338 v1(-6.356,-18.338)
STEPPER_12V_EN: Q1.1 R1.1 U2.13 | length 113.8
  Top Layer w0.254: -75.54,-16.5 -75.54,-21.036 -73.431,-23.145 -24.117,-23.145 -22.104,-21.132 v1(-21.85,-21.132) ; v1(-12.198,-20.878) -10.674,-22.402 21.584,-22.402 v1(21.838,-22.148) ; R1.1 24.632,-20.116 v1(24.632,-20.37)
  Top Layer w0.5: Q1.1 21.142,-16.563 23.108,-18.529 R1.1
  Bottom Layer w0.254: v1(-21.85,-21.132) -19.653,-21.132 -19.379,-21.405 -18.732,-21.405 -18.459,-21.132 -12.452,-21.132 v1(-12.198,-20.878) ; v1(21.838,-22.148) 23.616,-20.37 v1(24.632,-20.37)
STEPPER_12V_TEST: C8.1 R2.1 R18.2 U2.25 | length 93.2
  Top Layer w0.254: -47.6,-31.74 -47.6,-27.832 -45.472,-25.704 v1(-36.328,-25.704) ; v1(-4.578,-17.322) 3.042,-17.322 7.106,-13.258 v1(7.106,-12.75) ; C8.1 21.076,-5.13 v1(22.346,-3.86)
  Top Layer w0.5: C8.1 R18.2 R2.1
  Bottom Layer w0.254: v1(-36.328,-25.704) -27.946,-17.322 -20.669,-17.322 -20.395,-17.595 -19.748,-17.595 -19.475,-17.322 v1(-4.578,-17.322) ; v1(7.106,-12.75) 7.106,-10.972 14.218,-3.86 v1(22.346,-3.86)
STEPPER_DIR: R15.1 U2.4 | length 155.1
  Top Layer w0.254: -52.68,-19.04 -52.68,-14.37 -51.568,-13.258 -44.333,-13.258 -37.09,-6.015 -37.09,28.188 -33.175,32.103 21.943,32.103 22.308,31.738 v1(22.308,31.7) ; v1(23.108,2.49) 23.258,2.34 R15.1
  Bottom Layer w0.254: v1(22.308,31.7) 22.308,3.29 v1(23.108,2.49)
STEPPER_EN: R10.1 U2.3 | length 134.8
  Top Layer w0.254: -50.14,-19.04 -50.14,-14.37 -49.536,-13.766 -44.122,-13.766 -36.582,-6.226 -36.582,27.977 -32.964,31.595 20.822,31.595 21.498,30.919 23.089,30.919 23.362,31.192 v1(23.362,31.446) ; v1(23.87,20.524) 24.274,20.12 R10.1
  Bottom Layer w0.254: v1(23.362,31.446) 23.87,30.938 v1(23.87,20.524)
STEPPER_MS1: R11.1 U2.5 | length 147.3
  Top Layer w0.254: -55.22,-19.04 -55.22,-14.116 -53.854,-12.75 -44.543,-12.75 -37.598,-5.805 -37.598,28.398 -33.385,32.611 23.975,32.611 24.632,31.954 v1(24.632,31.7) ; v1(24.886,14.936) 27.53,17.58 R11.1
  Bottom Layer w0.254: v1(24.632,31.7) 24.651,31.681 24.651,20.201 24.632,20.181 24.632,15.19 v1(24.886,14.936)
STEPPER_MS2: R12.1 U2.6 | length 152.1
  Top Layer w0.254: -57.76,-19.04 -57.76,-13.1 -56.902,-12.242 -44.754,-12.242 -38.106,-5.594 -38.106,28.696 -33.683,33.119 25.245,33.119 v1(25.902,32.462) ; v1(25.902,13.666) 27.276,15.04 R12.1
  Bottom Layer w0.254: v1(25.902,13.666) v1(25.902,32.462)
STEPPER_MS3: R13.1 U2.7 | length 158.3
  Top Layer w0.254: -60.3,-19.04 -60.3,-13.608 -58.426,-11.734 -44.964,-11.734 -38.614,-5.384 -38.614,28.906 -33.893,33.627 27.023,33.627 v1(27.172,33.478) ; v1(27.172,11.126) 27.172,11.888 27.784,12.5 R13.1
  Bottom Layer w0.254: v1(27.172,11.126) v1(27.172,33.478)
STEPPER_STEP: R14.1 U2.2 | length 148.8
  Top Layer w0.254: -47.6,-19.04 -47.6,-14.878 -46.996,-14.274 -43.912,-14.274 -36.074,-6.436 -36.074,27.767 -32.754,31.087 20.165,31.087 v1(20.822,30.43) ; v1(20.822,2.998) 22.704,4.88 R14.1
  Bottom Layer w0.254: v1(20.822,2.998) v1(20.822,30.43)
TXD: U2.1 | length 2.5
  Top Layer w0.254: -45.06,-19.04 -45.06,-16.5
pads on no net: BZ1.0 C11.0 Designator151. Designator158.1 Designator158.2 Designator159.0 Designator159.1 Designator159.2 Designator160.1 Designator160.2 Designator160.3 Designator160.4 Designator160.5 Designator160.6 Designator160.7 Designator160.8 Designator160.9 Designator160.10 Designator160.11 Designator160.12 Designator160.13 Designator160.14 Designator160.15 Designator160.16 Designator160.17 Designator160.18 Designator160.19 Designator160.20 Designator160.21 Designator160.22 Designator160.23 Designator160.24 F1.0 F2.0 LD1.0 LD2.0 LD3.0 LD4.0 LD5.0 LD6.0 MH1.M3 MH2.M3 MH3.M3 MH4.M3 P5.3 Q1.0 Q2.0 R10.0 R11.0 R12.0 R13.0 R14.0 R15.0 S1.0 S1.5 S1.6

## Polygon pours and split planes (outlines as drawn)
NetC1_1 on Top Layer "NETC1_1_L01_P000" (solid, shelved, pour order 0): -65.03,3.76 -71.126,3.76 -71.126,-8.178 -67.824,-8.178 -67.824,-3.352 -65.03,-0.558
GND on Top Layer "GND_L01_P004" (solid, remove dead copper, shelved, pour order 4): -79.174,35.844 -79.174,-44.166 61.034,-44.166 61.034,35.59 60.78,35.844
GND on Bottom Layer "GND_L02_P002" (solid, remove dead copper, shelved, pour order 2): -79,35.51 -79,-44.5 61.208,-44.5 61.208,35.256 60.954,35.51

## Keep-outs
Keep-Out Layer:
  the board outline again, w0.1

## Other copper
Top Layer:
  rectangle: 32.125,8.408 32.379,9.241

## Silkscreen, mask and mechanical layers (free items; w line width, h text height)
Top Overlay:
  lines w0.15: 36.27,21.263 46.405,21.263
  text "v1.0a" at 43,68.5 h1
  text "Aus3D Stepper Driver Tester" at -42,66.5 h3
  text "-" at -59.964,30.938 h3
  text "+" at -44.964,30.938 h3
  text "-" at -69.348,25.858 h1.5
  text "+" at -66.808,25.858 h1.5
  text "EN" at 36.57,19.635 h1
  text "VMOT" at 42.412,19.635 h1
  text "MS1" at 36.57,17.095 h1
  text "GND" at 43.428,17.095 h1
  text "MS2" at 36.57,14.555 h1
  text "12V" at -77.73,13.92 h1.5
  text "MS3" at 36.57,12.015 h1
  text "STEP" at 36.57,4.395 h1
  text "5V" at 44.444,4.395 h1
  text "DIR" at 36.57,1.855 h1
  text "GND" at 43.428,1.855 h1
  text "PASS" at 32.76,-8.94 h1.52
  text "FAIL" at 43.301,-8.94 h1.52
  text "5V" at -76.968,-13.08 h1.5
  text "TEST" at 37.078,-33.197 h2

## Dimensions
-76,44.5 to -76,-44.5 on Mechanical 1
-79,41.5 to 79,41.5 on Mechanical 1

## Text inside footprints (layer, text, board x,y; h text height)
BZ1: Top Overlay "+" at -44.74,1.222 h2.29 r180
X1: Mechanical 15 "Vmot" at 86.105,74.98 h0.61; Mechanical 15 "GND" at 86.105,72.412 h0.61; Mechanical 15 "2B" at 86.105,69.844 h0.61; Mechanical 15 "2A" at 86.105,67.276 h0.61; Mechanical 15 "1A" at 86.105,64.709 h0.61; Mechanical 15 "1B" at 86.105,62.141 h0.61; Mechanical 15 "VDD" at 86.105,59.573 h0.61; Mechanical 15 "GND" at 86.105,57.005 h0.61; Mechanical 15 "EN" at 78.07,74.89 h0.61; Mechanical 15 "MS1" at 78.07,72.35 h0.61; Mechanical 15 "MS2" at 78.07,69.81 h0.61; Mechanical 15 "MS3" at 78.07,67.27 h0.61; Mechanical 15 "RST" at 78.07,64.73 h0.61; Mechanical 15 "SLP" at 78.07,62.19 h0.61; Mechanical 15 "STEP" at 78.07,59.65 h0.61; Mechanical 15 "DIR" at 78.07,57.11 h0.61